# Altium PCB JLink_Transfer2mm.PcbDoc
Units mil, origin at the board's own origin, x right, y up, seen from the top; angles counter-clockwise.
Board outline 1210.03 x 706.14 mil, 2 copper layers (Top Layer, Bottom Layer); 2 components, 13 nets, 30 pads, 0 vias.
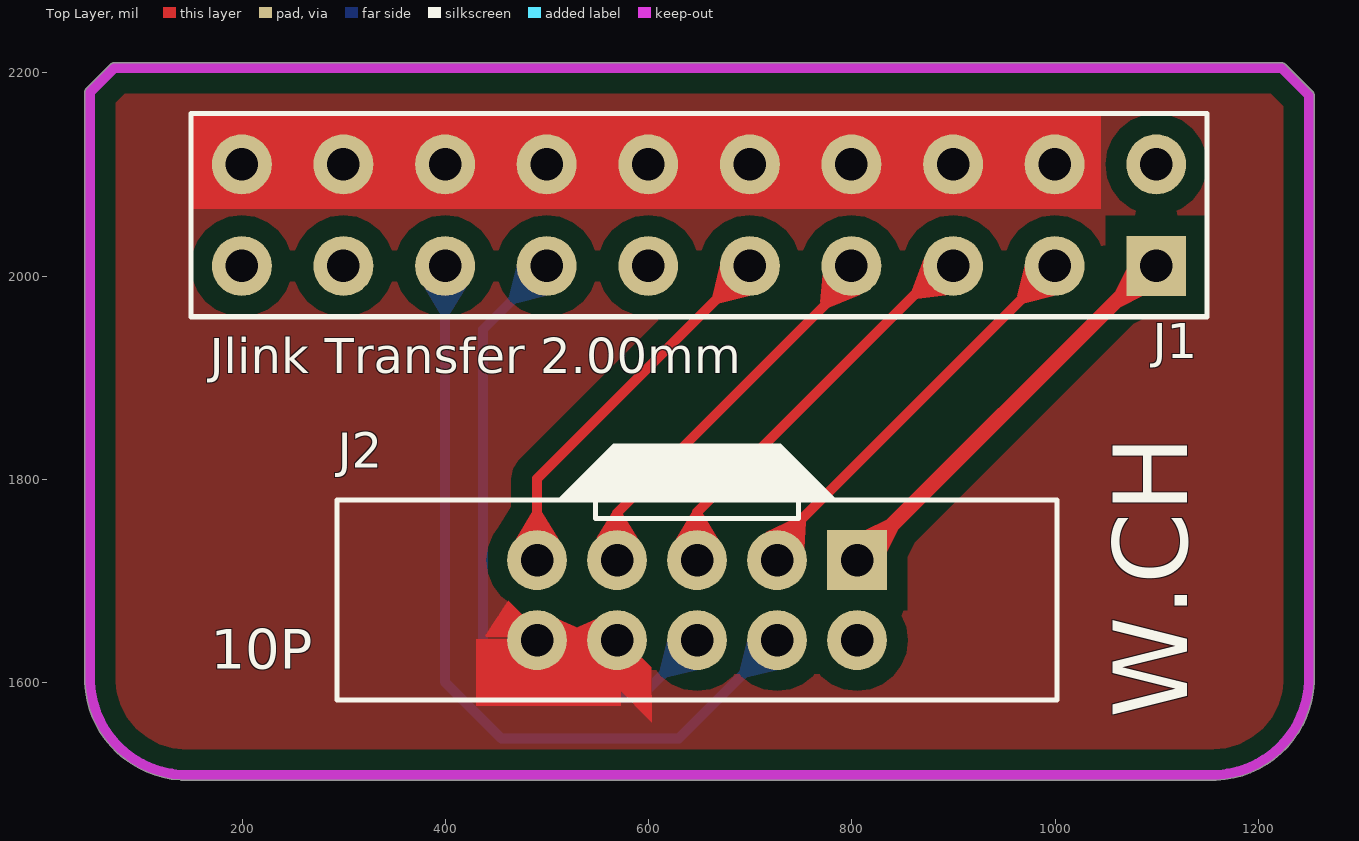
[diagram p0: Top Layer view]
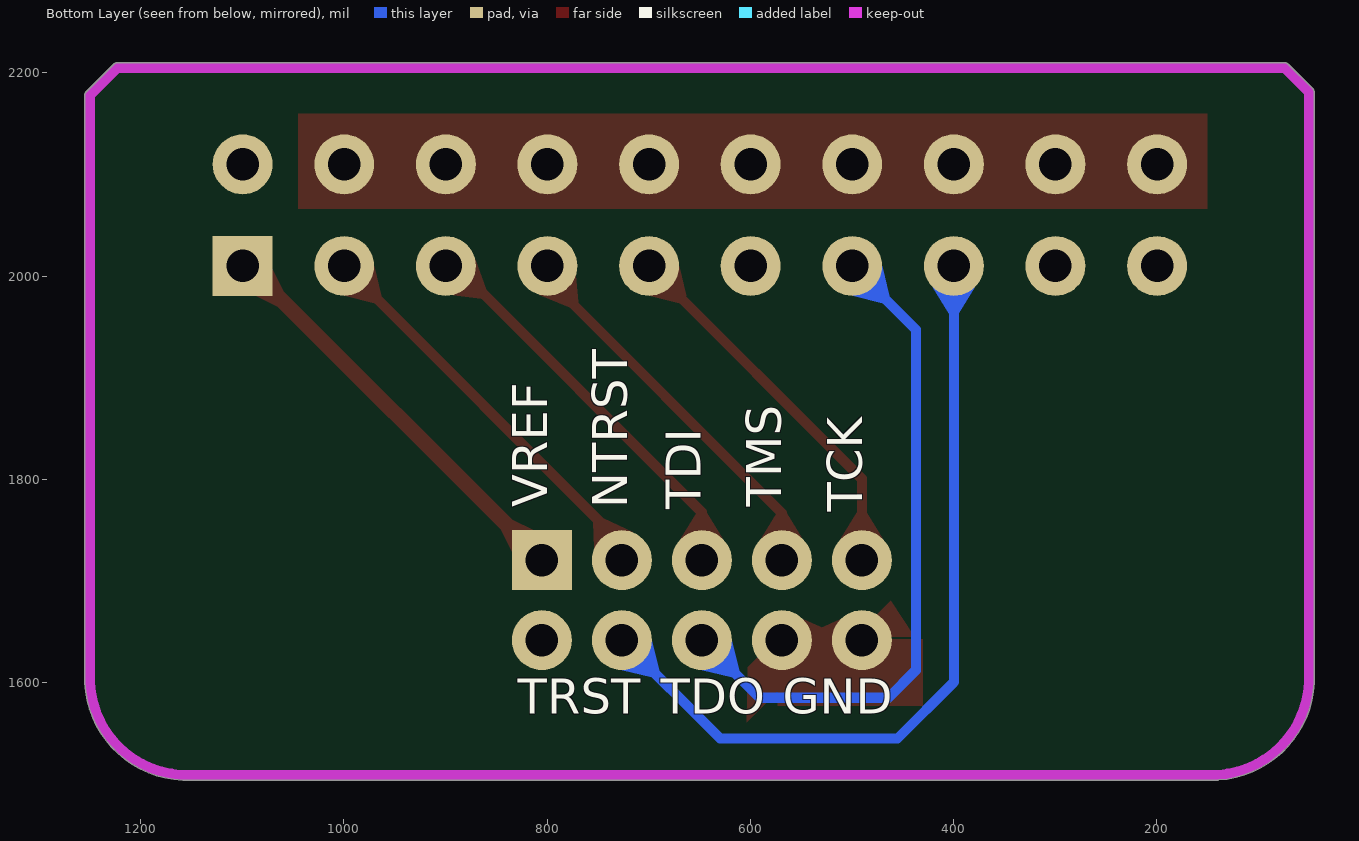
[diagram p1: Bottom Layer view, seen from below]

## Layer stack, top to bottom
Top Solder: solder mask 0.4, Solder Resist, Dk 3.5
Top Layer: signal copper 1.4
Dielectric1: dielectric 12.6, FR-4, Dk 4.8
Bottom Layer: signal copper 1.4
Bottom Solder: solder mask 0.4, Solder Resist, Dk 3.5

## Board outline
44.99,1599.76 cw(c50,1600) 44.98,1600 44.98,2181 cw(c50,2181) 46.47,2184.56 46.45,2184.55 70.45,2208.55 70.44,2208.53 cw(c74,2205) 74,2210.01 1223,2210.01 cw(c1223,2205) 1226.56,2208.53 1226.55,2208.55 1253.55,2181.55 1253.53,2181.56 cw(c1250,2178) 1255.01,2178 1255.01,1600 cw(c1250,1600) 1255.01,1599.76 cw(c1154.5,1604.5) 1149.88,1503.99 150.12,1503.99 cw(c145.5,1604.5) 140.88,1503.99 140,1503.99 cw(c140,1509) 138.98,1504.09 cw(c145.5,1604.5)

## Design rules (kind name [scope] priority, off if disabled: settings)
Clearance Clearance_1 [(InPolygon)] p1: gap=20
Clearance [All] p2: gap=6
FabricationTestPointUsage TestPointUsage [All] p1: valid=0 allowmultiple=FALSE
FabricationTestpoint Testpoint [All] p1: side=3 testpointundercomponent=TRUE minsize=40 maxsize=100 preferedsize=60 minholesize=0 maxholesize=40 preferedholesize=32 testpointgrid=1 allowsidetop=TRUE allowsidebottom=TRUE usegrid=TRUE gridtolerance=0.01
HoleSize [All] p1: absolutevalues=TRUE maxlimit=120 minlimit=1 maxpercent=80.000 minpercent=20.000
MinimumSolderMaskSliver [All] p1: minsoldermaskwidth=1
PlaneConnect [All] p1: planeconnectstyle=Relief reliefexpansion=20 reliefentries=4 reliefconductorwidth=15 reliefairgap=15
PolygonConnect [All] p1: connectstyle=Relief reliefconductorwidth=15 reliefentries=4 polygonreliefangle="90 Angle" airgapwidth=15
RoutingVias [All] p1: holewidth=28 width=50 viastyle="Through Hole" minholewidth=28 minwidth=50 maxholewidth=28 maxwidth=50
SilkToSilkClearance [All] p1: silktosilkclearance=0
SilkToSolderMaskClearance SilkscreenOverComponentPads [IsPad] p1: minsilkscreentomaskgap=0 clearancetoexposedcopper=TRUE
SolderMaskExpansion [All] p1: expansion=4
UnpouredPolygon [All] p1: allowunpoured=FALSE
Width [All] p1: maxlimit=70 minlimit=6 preferedwidth=10
22 further rules are at their usual default settings.

## Components (designator, comment, footprint, x,y, rotation, side; value= is the part's Value field where it differs from the comment)
J1 "J1" DIP-20-NEW 1099.61,2010 r180 top locked
J2 "J3" DIP-10-2.0 805.09,1720.44 r180 top locked (schematic designator J6)

## Footprints (in the part's own frame and the unit in brackets; to place one, negate y for a bottom-side part, rotate by r counter-clockwise, add the part's x,y. Pads: shape width x height; smd on the part's side, far side on the other; paste and mask are expansions set on the pad)
DIP-10-2.0 [mil]
  rect 59x59 hole 32: 1(0,0)
  round 59 hole 32: 2(0,78.74) 3(78.74,0) 4(78.74,78.74) 5(157.48,0) 6(157.48,78.74) 7(236.22,0) 8(236.22,78.74) 9(314.96,0) 10(314.96,78.74)
  silkscreen extent -197,-59 512,138
DIP-20-NEW [mil]
  rect 59x59 hole 32: 1(0,0)
  round 59 hole 32: 2(0,-100) 3(100,0) 4(100,-100) 5(200,0) 6(200,-100) 7(300,0) 8(300,-100) 9(400,0) 10(400,-100) 11(500,0) 12(500,-100) 13(600,0) 14(600,-100) 15(700,0) 16(700,-100) 17(800,0) 18(800,-100) 19(900,0) 20(900,-100)
  silkscreen extent -50,-150 950,50

## Nets (pads, with @x,y where several pads share a name; then routed paths per layer and width w, separated by ;. In a path a pad name is that pad's centre, name@x,y a point inside that pad or via, vN(x,y) a via of type N, cw(c..) or ccw(c..) an arc to the next point about the centre after c; other vN are vias at no path point)
+3.3V: J2.2
+3.3VSUPPLY: J1.2
DBGACK: J1.19
DBGRQ: J1.17
GND: J1.4 J1.6 J1.8 J1.10 J1.12 J1.14 J1.16 J1.18 J1.20 J2.8 J2.10 | length 878.7
  Top Layer w20: J2.10 J2.8
  Top Layer w30: J1.20 J1.18 J1.16 J1.14 J1.12 J1.10 J1.8 J1.6 J1.4
JTAG_RTCK: J1.11
JTAG_TCK: J1.9 J2.9 | length 376.3
  Top Layer w10: J2.9 490.13,1800.52 J1.9
JTAG_TDI: J1.5 J2.5 | length 399.6
  Top Layer w10: J2.5 647.61,1767.61 890,2010 J1.5
JTAG_TDO: J1.13 J2.6 | length 669.2
  Bottom Layer w10: J1.13 437,1947.39 437,1612 464,1585 590.91,1585 J2.6
JTAG_TMS: J1.7 J2.7 | length 385.1
  Top Layer w10: J2.7 568.87,1766.87 799.61,1997.61 J1.7
NSRST: J1.15 J2.4 | length 799.3
  Bottom Layer w10: J1.15 399.61,1600.39 455,1545 629.65,1545 J2.4
NTRST: J1.3 J2.3 | length 402.7
  Top Layer w10: J2.3 726.35,1736.74 J1.3
VREF: J1.1 J2.1 | length 414.5
  Top Layer w15: J2.1 1094.65,2010 J1.1

## Polygon pours and split planes (outlines as drawn)
GND on Top Layer "Bottom Layer-No Net" (solid, remove dead copper, pour order 7): 0,2240 1250,2240 1280,2210 1280,1500 30,1500 10,1520

## Keep-outs
Keep-Out Layer:
  lines w10: 140,1509 1150,1509 ccw(c1154.5,1604.5) 1250,1600 1250,2049 1250,2178 1223,2205 74,2205 50,2181 50,2049.5 50,1600 ccw(c145.5,1604.5) 150,1509

## Other copper
Top Layer:
  rectangle net GND: 150,2066.1 1045,2160
  rectangle net GND: 430,1577 573,1643
  region net GND: 461.85,1680.42 483,1659.27 483,1645 440,1645 439,1646
  region net GND: 602.53,1614.87 575.7,1641.7 568.87,1641.7 568.87,1595.13 603.22,1560.78

## Silkscreen, mask and mechanical layers (free items; w line width, h text height)
Top Overlay:
  rectangle: 545,1779 750,1815
  region: 545,1815 510,1780 510,1778 544,1778 545,1779
  region: 750,1815 785,1780 785,1778 751,1778 750,1779
  region: 545,1815 565,1835 730,1835 756,1809
  text "Jlink Transfer 2.00mm" at 168,1893 h59.06
  text "10P" at 169,1601 h66.93
  text "W.CH" at 1154,1565 h125.98 r90
Bottom Overlay:
  text "TMS" at 558,1773 h59.06 r270
  text "VREF" at 788.61,1772.62 h59.06 r270
  text "NTRST" at 709.61,1771.62 h59.06 r270
  text "TDI" at 637.61,1770.62 h59.06 r270
  text "TCK" at 478.24,1768 h59.06 r270
  text "GND" at 568,1558 h59.06
  text "TDO" at 688,1558 h59.06
  text "TRST" at 829,1558 h59.06